# Altium PCB Bottom-PCB.PcbDoc
Units mm, origin at the board's own origin, x right, y up, seen from the top; angles counter-clockwise.
Board outline 85.99 x 22 mm, 2 copper layers (Top Layer, Bottom Layer); 3 components, 7 nets, 16 pads, 1 vias.
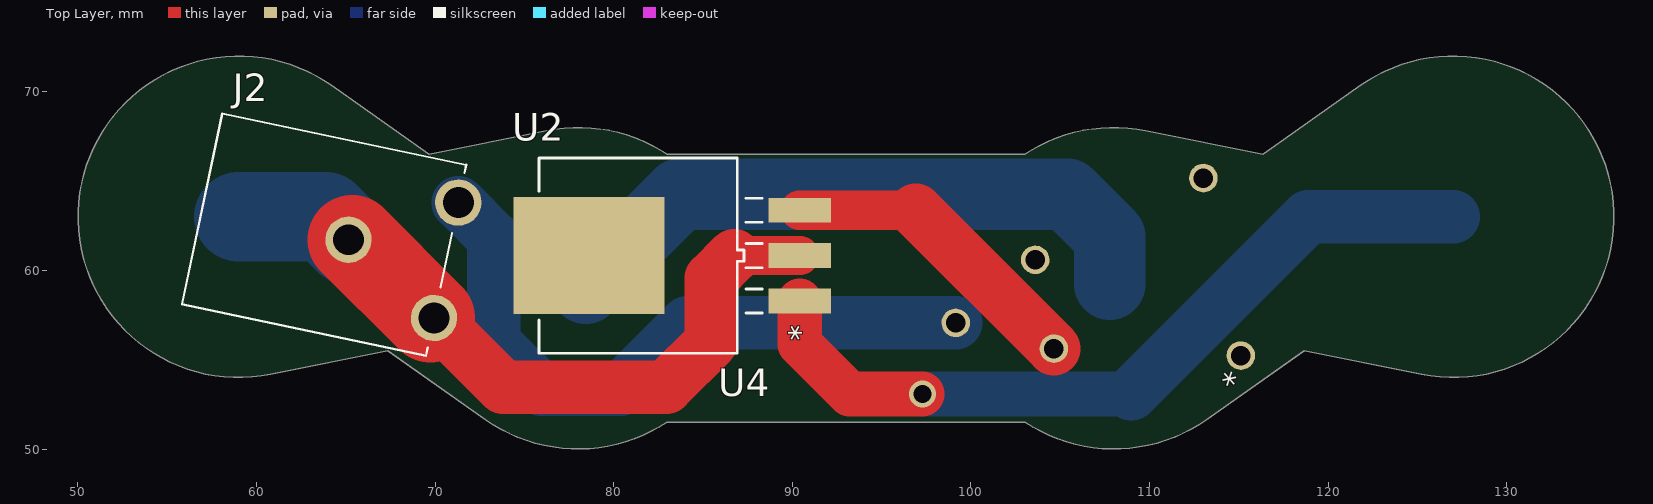
[diagram p0: Top Layer view]
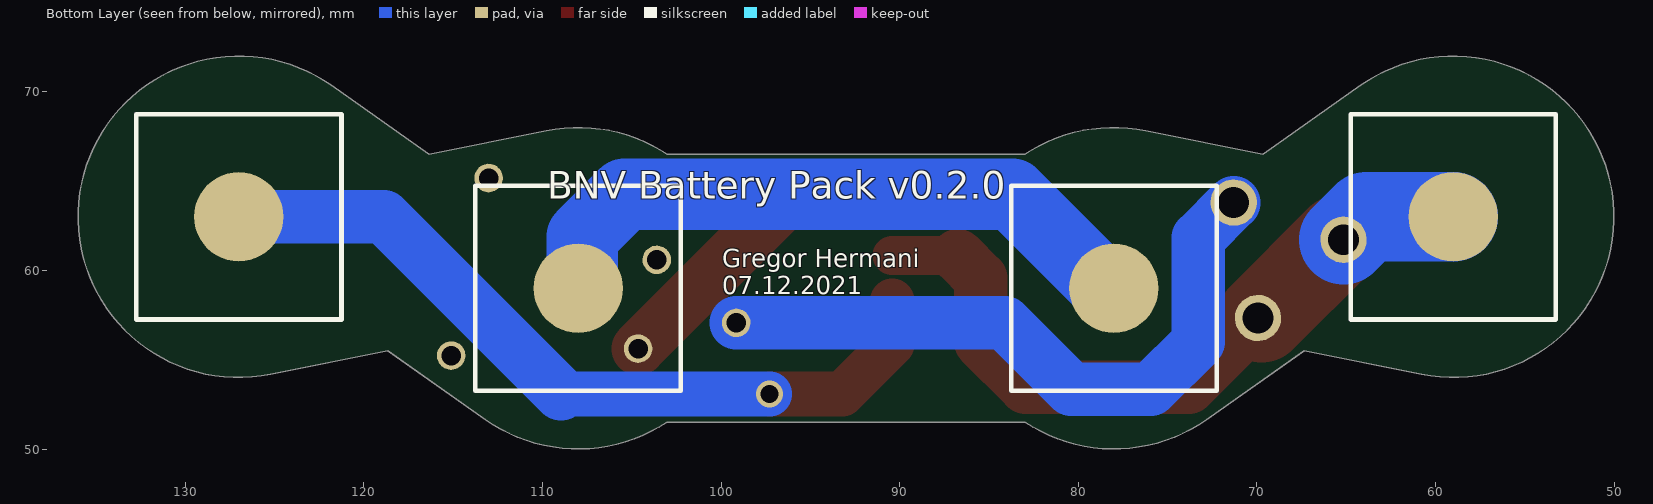
[diagram p1: Bottom Layer view, seen from below]
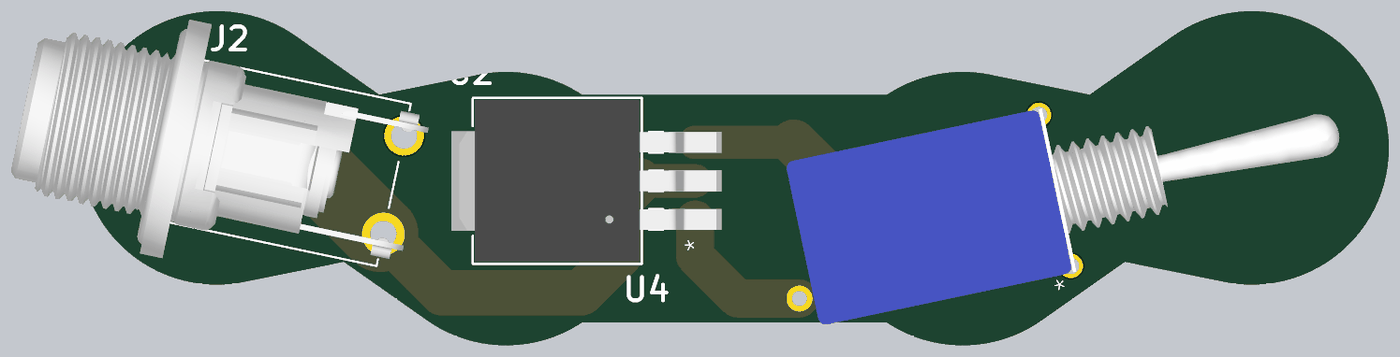
[diagram p2: 3D render of the assembled board from above, using the file's embedded part models]

## Layer stack, top to bottom
Top Solder: solder mask 0.0102, Solder Resist, Dk 3.5
Top Layer: signal copper 0.0356
Dielectric 1: dielectric 0.32, FR-4, Dk 4.8
Bottom Layer: signal copper 0.0356
Bottom Solder: solder mask 0.0102, Solder Resist, Dk 3.5

## Board outline
60.785,54.184 67.349,55.507 72.822,51.65 ccw(c78.006,59.006) 82.981,51.506 103.031,51.506 ccw(c108.006,59.006) 113.191,51.65 118.664,55.507 125.228,54.184 ccw(c127.006,63.006) 121.822,70.363 116.349,66.506 109.785,67.829 ccw(c108.006,59.006) 103.031,66.506 82.981,66.506 ccw(c78.006,59.006) 76.228,67.829 69.664,66.506 64.191,70.363 ccw(c59.006,63.006)

## Design rules (kind name [scope] priority, off if disabled: settings)
Clearance [All] p1: gap=0.254 ignorepadtopadclearanceinfootprint=FALSE except(0: Arc-Hole Track-Hole SMDPad-Hole THPad-Hole Via-Hole Fill-Hole Poly-Hole Region-Hole Text-Hole)
PolygonConnect [All] p1: connectstyle=Relief reliefconductorwidth=0.254 reliefentries=4 polygonreliefangle="90 Angle" airgapwidth=0.254
RoutingVias [All] p1: holewidth=0.711 width=1.27 viastyle="Through Hole" minholewidth=0.711 minwidth=1.27 maxholewidth=0.711 maxwidth=1.27
SolderMaskExpansion [All] p1: expansion=0.102 istentingtop=FALSE
Width [All] p1: maxlimit=0.254 minlimit=0.254 preferedwidth=0.254
30 further rules are at their usual default settings.

## Components (designator, comment, footprint, x,y, rotation, side; value= is the part's Value field where it differs from the comment)
J2 "L722RA" SWITCHCRAFT_L722RA 70.619,60.57 r348.1 top locked
U2 "MIC2937A-12WU-TR" TO-263-3_MCH 81.369,60.833 r90 top
U4 "21136NA" SWITCH_21136_APM 79.764,58.169 r101.9 top locked

## Footprints (in the part's own frame and the unit in brackets; to place one, negate y for a bottom-side part, rotate by r counter-clockwise, add the part's x,y. Pads: shape width x height; smd on the part's side, far side on the other; paste and mask are expansions set on the pad)
SWITCH_21136_APM [mil]
  round 63 hole 43: 1(-300,-938) 2(-200,-738) 3(-100,-938) 4(-400,-1338) 5(0,-1338)
  body extent -418,-2088 15,-670, height 428
SWITCHCRAFT_L722RA [mm]
  round 2.595 hole 1.73: C(0,3.302) S(-5.588,0) SS(0,-3.302)
  silkscreen extent -13.97,-5.46 0,5.46, body extent -24.79,-7.86 1.48,7.89, height 19.24
TO-263-3_MCH [mil]
  rect 54.97x137.56 smd paste+0 mask+0: 1(-100,-356.5) 2(0,-356.5) 3(100,-356.5)
  rect 258x333 smd paste+0 mask+0: 4(0,108)
  silkscreen extent -215,-274 215,218, body extent -210,-411 210,254, height 181

## Part data
J2: "Power Barrel Connector Jack 2.50mm ID (0.098\"), 5.50mm OD (0.217\") Panel Mount, Through Hole, Right Angle", Package=None, Availability=Unavailable, MP=L722RA, Price=None
U2: "No Description Available", Mfr_Name=Microchip, Copyright="Copyright (C) 2021 Ultra Librarian. All rights reserved.", Manufacturer_Part_Number=MIC2937A-12WU-TR, RefDes=RefDes, Type=DEV
U4: "No Description Available", Mfr_Name=Apem, Copyright="Copyright (C) 2021 Ultra Librarian. All rights reserved.", Manufacturer_Part_Number=21136NA, RefDes=RefDes, Type=DEV

## Free pads (board coordinates)
  round 5 smd far side: B1(59.006,63.006) B2(78.006,59.006) B3(108.006,59.006) B4(127.006,63.006)

## Via types
v1: diameter 1.5, hole 1, Top Layer to Bottom Layer, 1 vias

## Nets (pads, with @x,y where several pads share a name; then routed paths per layer and width w, separated by ;. In a path a pad name is that pad's centre, name@x,y a point inside that pad or via, vN(x,y) a via of type N, cw(c..) or ccw(c..) an arc to the next point about the centre after c; other vN are vias at no path point)
+12: U2.3 U4.1 | length 17.6
  Top Layer w0.254: U4.1 U4.1@104.775,55.626
  Top Layer w2.2: U2.3 96.901,63.373
  Top Layer w3: 96.901,63.373 U4.1
GND: J2.S J2.SS pad.B1 U2.2 | length 40.9
  Top Layer w0.254: J2.S J2.S@65.353,61.722 ; J2.SS@69.736,57.339 J2.SS
  Top Layer w2.2: 86.741,60.833 U2.2
  Top Layer w3: J2.SS 73.81,53.467 82.931,53.467 85.471,56.007 85.471,59.563 86.741,60.833
  Top Layer w5: J2.S@65.353,61.722 J2.SS@69.736,57.339
  Bottom Layer w0.254: J2.S J2.S@65.353,61.722 ; J2.SS@69.736,57.339 J2.SS
  Bottom Layer w5: pad.B1 63.867,63.006 J2.S
Int1: 
Int2: pad.B2 pad.B3 | length 35.9
  Bottom Layer w0.254: pad.B2 pad.B2@78.437,59.006
  Bottom Layer w2: pad.B3@107.785,59.227 pad.B3
  Bottom Layer w4: pad.B2@78.437,59.006 83.693,64.262 105.41,64.262 107.785,61.887 pad.B3@107.785,59.227
Int3: 
NetJ2_C: J2.C U4.2 | length 37.1
  Bottom Layer w3: J2.C 73.279,61.822 73.279,56.007 75.946,53.34 80.391,53.34 84.115,57.064 U4.2
V_bat: pad.B4 U2.1 | length 44.6
  Top Layer w0.254: v1@97.044,53.324 v1(97.282,53.086)
  Top Layer w2.5: U2.1 90.424,55.88 93.218,53.086 v1(97.282,53.086)
  Bottom Layer w2.5: v1(97.282,53.086) 108.966,53.086
  Bottom Layer w3: 108.966,53.086 118.886,63.006 pad.B4
pads on no net: U2.4 U4.3 U4.4 U4.5

## Silkscreen, mask and mechanical layers (free items; w line width, h text height)
Bottom Overlay:
  lines w0.254: 53.256,57.256 64.756,57.256 64.756,68.756 53.256,68.756 53.256,57.256 ; 72.256,53.256 83.756,53.256 83.756,64.756 72.256,64.756 72.256,53.256 ; 102.256,53.256 113.756,53.256 113.756,64.756 102.256,64.756 102.256,53.256 ; 121.256,57.256 132.756,57.256 132.756,68.756 121.256,68.756 121.256,57.256
  text "BNV Battery Pack v0.2.0" at 109.728,64.008 h1.52
  text "Gregor Hermani / 07.12.2021" at 99.949,58.674 h1
Mechanical 1:
  the board outline again, w0.013
Drill Drawing:
  circle w0.1: c127.006,63.006 r8
  circle w0.1: c108.006,59.006 r8
  circle w0.1: c59.006,63.006 r8
  circle w0.1: c78.006,59.006 r8

## Text inside footprints (layer, text, board x,y; h text height)
U2: Top Overlay "*" at 91.059,56.07 h1.27 r90; Mechanical 13 "*" at 87.173,57.975 h1.27 r90
U4: Top Overlay "*" at 115.441,53.682 h1.27 r101.9; Mechanical 13 "*" at 116.683,53.944 h1.27 r101.9